# Altium PCB Project.PcbDoc
Units mm, origin at the board's own origin, x right, y up, seen from the top; angles counter-clockwise.
Board outline 25.53 x 18.29 mm, 2 copper layers (Top Layer, Bottom Layer); 40 components, 22 nets, 110 pads, 15 vias.
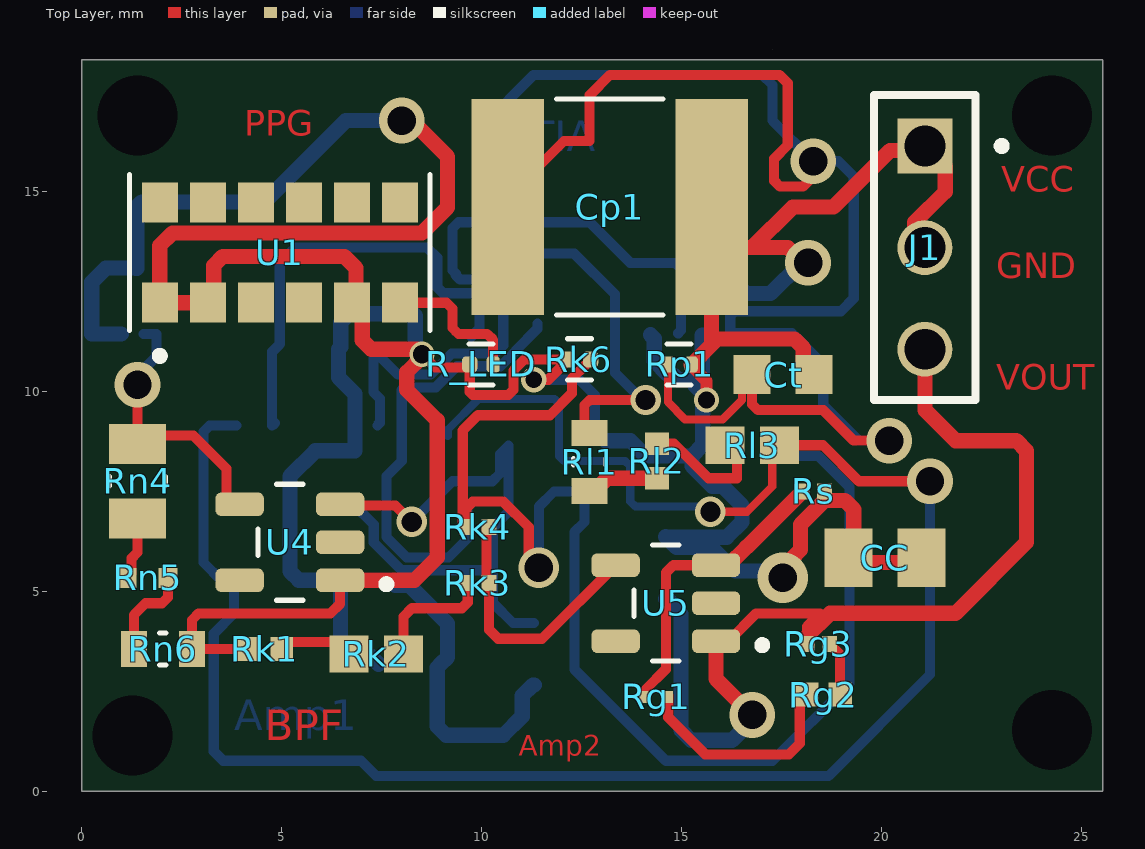
[diagram p0: Top Layer view]
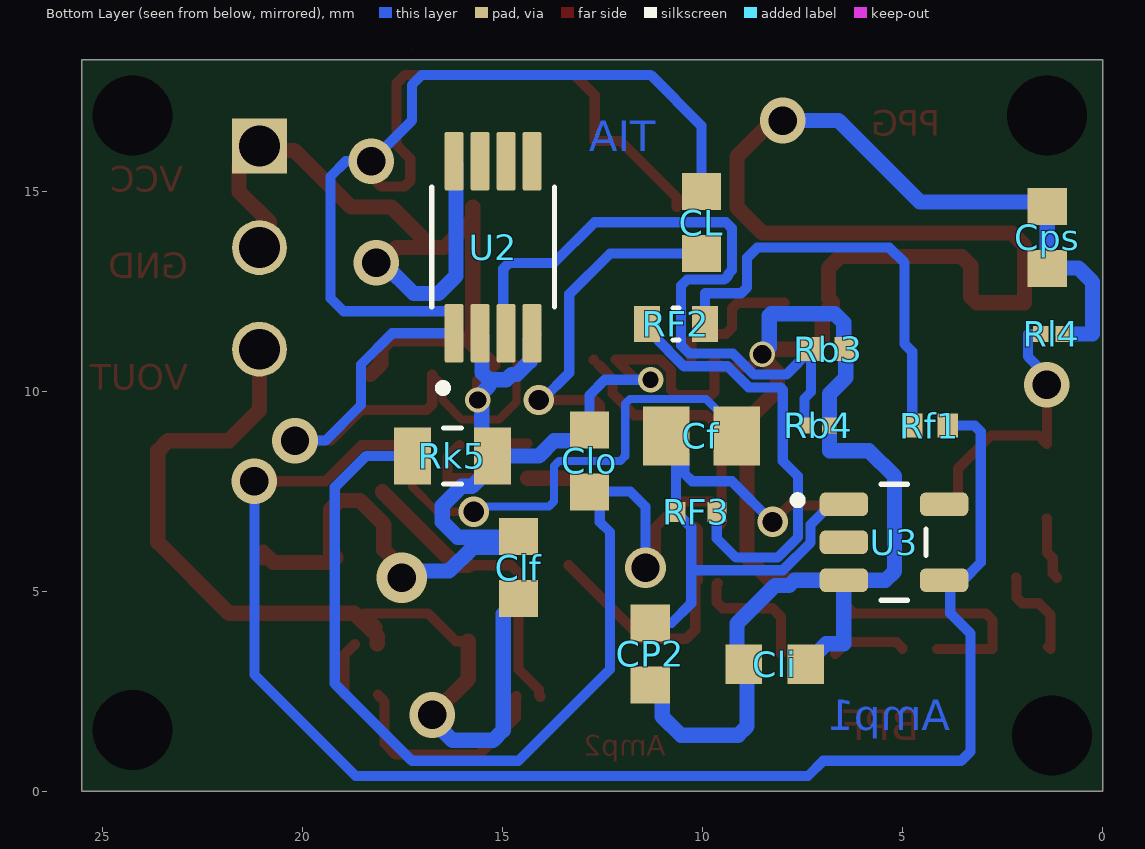
[diagram p1: Bottom Layer view, seen from below]

## Layer stack, top to bottom
Top Solder: solder mask 0.0102, Solder Resist, Dk 3.5
Top Layer: signal copper 0.0356
Dielectric 1: dielectric 0.32, FR-4, Dk 4.8
Bottom Layer: signal copper 0.0356
Bottom Solder: solder mask 0.0102, Solder Resist, Dk 3.5

## Board outline
0,0 25.527,0 25.527,18.288 0,18.288
cut-out: 17.272,18.542

## Design rules (kind name [scope] priority, off if disabled: settings)
Clearance [All] p1: gap=0.065 ignorepadtopadclearanceinfootprint=FALSE
HoleSize [All] p1: absolutevalues=TRUE maxlimit=2.54 minlimit=0.076 maxpercent=80.000 minpercent=20.000
HoleToHoleClearance [All] p1: gap=0.09 allowstackedmicrovias=TRUE
MinimumSolderMaskSliver [All] p1: minsoldermaskwidth=0.025
PolygonConnect [All] p1: connectstyle=Relief reliefconductorwidth=0.254 reliefentries=4 polygonreliefangle="90 Angle" airgapwidth=0.254
RoutingVias [All] p1: holewidth=0.711 width=1.27 viastyle="Through Hole" minholewidth=0.711 minwidth=1.27 maxholewidth=0.711 maxwidth=1.27
SilkToSilkClearance [All] p1: silktosilkclearance=0.127
SilkToSolderMaskClearance [IsText] p1: minsilkscreentomaskgap=0.127 clearancetoexposedcopper=TRUE
SolderMaskExpansion [All] p1: expansion=0.102
Width [All] p1: maxlimit=0.381 minlimit=0.127 preferedwidth=0.381
25 further rules are at their usual default settings.

## Components (designator, comment, footprint, x,y, rotation, side; value= is the part's Value field where it differs from the comment)
CC "22uF" INDC2112X145N 20.082,5.837 r0 top
Cf "0.39uF" CAPC2012X140N 10.033,8.88 r0 bottom (schematic designator CF)
CL "0.68uF" CAPC1608X90N 10.033,14.214 r270 bottom
Clf "10pF" CAPC1608X90N 14.605,5.588 r270 bottom
Cli "10pF" CAPC1608X90N 8.198,3.175 r180 bottom
Clo "10pF" CAPC1608X90N 12.827,8.255 r270 bottom
Cp1 "27nF" CAPC5750X330N 13.198,14.605 r180 top
CP2 "10pF" CAPC1608X90N 11.313,3.429 r90 bottom (schematic designator Cp2)
Cps "10pF" CAPC1608X90N 1.387,13.843 r90 bottom
Ct "10pF" CAPC1608X90N 17.536,10.414 r180 top
J1 "TSW-101-24-G-T" SAMTEC_TSW-101-24-G-T 21.082,16.129 r180 top
R_LED "100" RESC0603X26N#1 9.982,10.668 r180 top
Rb3 "220K" RESC1005X40N#1 6.858,11.049 r180 bottom
Rb4 "10K" RESC0603X26N#2 7.112,9.144 r0 bottom
Rf1 "100K" RESC1005X40N#2 4.318,9.138 r0 bottom (schematic designator RF1)
RF2 "5.1K" RES_ERA3AEB512V 10.668,11.684 r0 bottom
RF3 "240" RES_ERA2AED241X 10.16,6.985 r0 bottom
Rg1 "43K" *RES_ERJ1GNF4302C 14.363,2.355 r0 top
Rg2 "3.6K" RESC1005X35N 18.542,2.413 r0 top
Rg3 "160" RESC0603X26N#2 18.415,3.683 r180 top
Rk1 "82K" RESC1005X40N#1 4.572,3.556 r0 top
Rk2 "7.5K" RESC1508X50N 7.366,3.429 r0 top
Rk3 "510" *RESC0603X26N 9.906,5.207 r0 top
Rk4 "10K" RESC0603X26N#2 9.906,6.604 r0 top
Rk5 "400K" RESC2012X50N 16.256,8.382 r0 bottom
Rk6 "100K" RESC0603X26N#1 12.446,10.795 r0 top
Rl1 "300K" *RES_ERA3AEB304V 12.7,8.232 r270 top
Rl2 "56K" RESC1005X40N#1 14.378,8.255 r90 top
Rl3 "7.5K" RESC1508X50N 16.764,8.646 r0 top
Rl4 "10K" RESC0603X26N#2 1.27,11.43 r0 bottom
Rn4 "270K" RESC2012X65N 1.397,7.747 r270 top
Rn5 "22K" *RES_ERA2AEB223X 1.651,5.334 r0 top
Rn6 "750" RES_ERA3AEB751V 2.032,3.556 r0 top
Rp1 "1000K" RESC0603X26N#1 14.935,10.668 r180 top
Rs "10K" RESC0603X26N#2 18.288,7.493 r180 top
U1 "SFH_7072" XDCR_SFH_7072 4.953,13.462 r90 top
U2 "TIA 1(OPA2380)" SOP65P490X110-8N 15.24,13.599 r90 bottom
U3 "OP AMP-BPF" SOT95P280X145-5N 5.217,6.223 r180 bottom
U4 "OP AMP-Amp_Stage-l1" SOT95P280X145-5N 5.207,6.223 r180 top
U5 "LMH6609MFX/NOPB" SOT95P280X145-5N 14.605,4.699 r180 top

## Footprints (in the part's own frame and the unit in brackets; to place one, negate y for a bottom-side part, rotate by r counter-clockwise, add the part's x,y. Pads: shape width x height; smd on the part's side, far side on the other; paste and mask are expansions set on the pad)
*RES_ERA2AEB223X [mm]
  rect 0.475x0.5 smd: 1(-0.512,0) 2(0.512,0)
*RES_ERA3AEB304V [mm]
  rect 0.65x0.9 smd: 1(-0.725,0) 2(0.725,0)
  silkscreen extent -0.08,-0.4 0.08,0.4
*RES_ERJ1GNF4302C [mm]
  rect 0.25x0.3 smd: 1(-0.3,0) 2(0.3,0)
*RESC0603X26N [mm]
  rect 0.38x0.4 smd: 1(-0.281,0) 2(0.281,0)
CAPC1608X90N [mm]
  rect 0.92x0.98 smd: 1(-0.775,0) 2(0.775,0)
CAPC2012X140N [mm]
  rect 1.16x1.47 smd: 1(-0.88,0) 2(0.88,0)
CAPC5750X330N [mm]
  rect 1.81x5.41 smd: 1(-2.55,0) 2(2.55,0)
  silkscreen extent -1.33,-2.7 1.33,2.7
INDC2112X145N [mm]
  rect 1.2x1.47 smd: 1(-0.91,0) 2(0.91,0)
RES_ERA2AED241X [mm]
  rect 0.475x0.5 smd: 1(-0.512,0) 2(0.512,0)
  body extent -0.5,-0.25 0.5,0.25, height 0.35
RES_ERA3AEB512V [mm]
  rect 0.65x0.9 smd: 1(-0.725,0) 2(0.725,0)
  silkscreen extent -0.08,-0.4 0.08,0.4, body extent -0.8,-0.4 0.8,0.4, height 0.45
RES_ERA3AEB751V [mm]
  rect 0.65x0.9 smd: 1(-0.725,0) 2(0.725,0)
  silkscreen extent -0.08,-0.4 0.08,0.4, body extent -0.8,-0.4 0.8,0.4, height 0.45
RESC0603X26N#1 [mm]
  rrect50% 0.33x0.4 smd: 1(-0.305,0)
  rrect50% 0.38x0.4 smd: 2(0.28,0)
  silkscreen extent -0.3,-0.52 0.3,0.52
RESC0603X26N#2 [mm]
  rect 0.38x0.4 smd: 1(-0.281,0) 2(0.281,0)
  body extent -0.3,-0.15 0.3,0.15, height 0.26
RESC1005X35N [mm]
  rect 0.59x0.6 smd: 1(-0.42,0) 2(0.42,0)
RESC1005X40N#1 [mm]
  rect 0.56x0.6 smd: 1(-0.435,0) 2(0.435,0)
RESC1005X40N#2 [mm]
  rect 0.51x0.6 smd: 1(-0.445,0) 2(0.445,0)
RESC1508X50N [mm]
  rect 0.97x0.93 smd: 1(-0.68,0) 2(0.68,0)
RESC2012X50N [mm]
  rect 0.92x1.42 smd: 1(-1,0) 2(1,0)
  silkscreen extent -0.22,-0.7 0.22,0.7
RESC2012X65N [mm]
  rect 1x1.42 smd: 1(-0.935,0) 2(0.935,0)
  silkscreen extent -0.12,-0.7 0.12,0.7
SAMTEC_TSW-101-24-G-T [mm]
  rect 1.37x1.37 hole 1.02: 01(0,0)
  round 1.37 hole 1.02: 02(0,2.54) 03(0,5.08)
  silkscreen extent -2.02,-1.27 1.27,6.35
SOP65P490X110-8N [mm]
  rrect25% 1.47x0.48 smd: 1(-2.15,0.975) 2(-2.15,0.325) 3(-2.15,-0.325) 4(-2.15,-0.975) 5(2.15,-0.975) 6(2.15,-0.325) 7(2.15,0.325) 8(2.15,0.975)
  silkscreen extent -3.62,-1.54 1.5,1.54
SOT95P280X145-5N [mm]
  rrect50% 1.21x0.59 smd: 1(-1.255,0.95) 2(-1.255,0) 3(-1.255,-0.95) 4(1.255,-0.95) 5(1.255,0.95)
  silkscreen extent -2.51,-1.45 0.8,1.45
XDCR_SFH_7072 [mm]
  rect 1x0.9 smd paste-1 mask+0: 1(-1.25,3) 2(-1.25,1.8) 3(-1.25,0.6) 4(-1.25,-0.6) 5(-1.25,-1.8) 6(-1.25,-3) 7(1.25,-3) 8(1.25,-1.8) 9(1.25,-0.6) 10(1.25,0.6) 11(1.25,1.8) 12(1.25,3)
  silkscreen extent -2.68,-3.76 1.95,3.76

## Part data
CC: library part LMK212BBJ226MG-T, "22µF ±20% 10V Ceramic Capacitor X5R 0805 (2012 Metric)", Package="0805 Taiyo Yuden", Availability=Good, DigiKey-Purchase-URL=https://snapeda.com/shop?store=DigiKey&id=1756934, MF="Taiyo Yuden", Mouser-Purchase-URL=https://snapeda.com/shop?store=Mouser&id=1756934, MP=LMK212BBJ226MG-T, Price=None, SnapEDA_Link=https://www.snapeda.com/parts/LMK212BBJ226MG-T/Taiyo%20Yuden/view-part/1756934/?ref=snap
Cf: library part 0805YC394JAT2A, "0.39µF ±5% 16V Ceramic Capacitor X7R 0805 _2012 Metric_", Package="2012 AVX", Digi-Key_Part_Number=478-10574-2-ND, Digi-Key_Purchase_URL=https://www.digikey.com/product-detail/en/avx-corporation/0805YC394JAT2A/478-10574-2-ND/1603316?utm_source=snapeda&utm_medium=aggregator&utm_campaign=symbol, MF=AVX, MP=0805YC394JAT2A, SnapEDA_Link=https://www.snapeda.com/parts/0805YC394JAT2A/AVX/view-part/606850/?ref=snap
CL: library part C1608X7R1C684K080AC, "Multilayer Ceramic Capacitor, C Series, 0.68 - F, - 10%, X7R, 16 V, 0603 [1608 Metric]", Package=None, Availability=Unavailable, MP=C1608X7R1C684K080AC, Price=None
Clf Cli Clo CP2 Cps Ct: library part 06035A100JAT2A, "10PF 5% 50V C0G 0603", Package=None, Availability=Unavailable, MP=06035A100JAT2A, Price=None
Cp1: library part 06033C104KAT4A, "2220GC273KAT1A", Package="1608 AVX", Digi-Key_Part_Number=478-7018-1-ND, Digi-Key_Purchase_URL=https://www.digikey.com/product-detail/en/avx-corporation/06033C104KAT4A/478-7018-1-ND/3247565?utm_source=snapeda&utm_medium=aggregator&utm_campaign=symbol, MF=AVX, MP=06033C104KAT4A, SnapEDA_Link=https://www.snapeda.com/parts/06033C104KAT4A/AVX/view-part/1797095/?ref=snap
J1: "Connector Header Through Hole 3 position", Package=None, Availability=Bad, Check_prices=https://www.snapeda.com/parts/TSW-101-24-G-T/Samtec/view-part/3380371/?ref=eda, MF=Samtec, MP=TSW-101-24-G-T, Price=None, Purchase-URL=https://pricing.snapeda.com/search/part/TSW-101-24-G-T/?ref=eda, SnapEDA_Link=https://www.snapeda.com/parts/TSW-101-24-G-T/Samtec/view-part/3380371/?ref=snap
R_LED: library part RC0201FR-07100RL, "100 Ohms ±1% 0.05W, 1/20W Chip Resistor 0201 _0603 Metric_ Moisture Resistant Thick Film", Package="0201 Yageo", Digi-Key_Part_Number=311-100MCT-ND, MF=Yageo, MP=RC0201FR-07100RL, SnapEDA_Link=https://www.snapeda.com/parts/RC0201FR-07100RL/Yageo/view-part/938913/?ref=snap
Rb3: library part CRGCQ0402F220K, "Fixed Resistor CRGCQ 0402 220K 1%", Package=None, Availability=Unavailable, MP=CRGCQ0402F220K, Price=None
Rb4 Rk4 Rl4 Rs: library part RMCF0201FT10K0, "10 kOhms ±1% 0.05W, 1/20W Chip Resistor 0201 (0603 Metric) Thick Film", Package="0603 Rohm Semiconductor", Availability=Good, MF="Stackpole Electronics Inc", MP=RMCF0201FT10K0, Price=None, Purchase-URL=https://pricing.snapeda.com/search/part/RMCF0201FT10K0/?ref=eda, SnapEDA_Link=https://www.snapeda.com/parts/RMCF0201FT10K0/Stackpole%20Electronics%20Inc/view-part/3959982/?ref=snap
Rf1: library part RR0510P-104-D, "RES, THIN FILM, 100K, 0.5%, 0.063W, 0402, REEL", Package=None, Availability=Unavailable, MP=RR0510P-104-D, Price=None
RF2: library part ERA3AEB512V, "5.1 kOhms 0.1% 0.1W, 1/10W Chip Resistor 0603 (1608 Metric) Automotive AEC-Q200 Thin Film", Package="1608-2 Panasonic", Availability="In Stock", Check_prices=https://www.snapeda.com/parts/ERA-3AEB512V/Panasonic%20Electronic%20Components/view-part/329488/?ref=eda, MF=Panasonic, MP=ERA-3AEB512V, Price=None, SnapEDA_Link=https://www.snapeda.com/parts/ERA-3AEB512V/Panasonic%20Electronic%20Components/view-part/329488/?ref=snap
RF3: library part ERA2AED241X, "240 Ohms 0.5% 0.063W, 1/16W Chip Resistor 0402 (1005 Metric) Automotive AEC-Q200 Thin Film", Package="1005-2 Panasonic", Availability="In Stock", Check_prices=https://www.snapeda.com/parts/ERA-2AED241X/Panasonic/view-part/3718380/?ref=eda, MF=Panasonic, MP=ERA-2AED241X, Price=None, SnapEDA_Link=https://www.snapeda.com/parts/ERA-2AED241X/Panasonic/view-part/3718380/?ref=snap
Rg1: library part ERJ1GNF4302C, "None", Availability=Unavailable, MF=Panasonic, MP=ERJ1GNF4302C, Package=None, Price=None
Rg2: library part RMCF0402FT3K60, Package=None, Availability=Unavailable, MP=RMCF0402FT3K60, Price=None
Rg3: library part RC0201FR-07160RL, "Res Thick Film 0201 160 Ohm 1% 0.05W(1/20W) ±200ppm/°C Pad SMD T/R", Package="0603 Rohm Semiconductor", Availability="In Stock", Check_prices=https://www.snapeda.com/parts/RC0201FR-07160RL/Yageo/view-part/967070/?ref=eda, MF=Yageo, MP=RC0201FR-07160RL, Price=None, SnapEDA_Link=https://www.snapeda.com/parts/RC0201FR-07160RL/Yageo/view-part/967070/?ref=snap
Rk1: library part CRGCQ0402F82K, "Fixed Resistor CRGCQ 0402 82K 1%", Package=None, Availability=Unavailable, MP=CRGCQ0402F82K, Price=None
Rk2 Rl3: library part RNCP0603FTD7K50, Package=None, Availability=Unavailable, MP=RNCP0603FTD7K50, Price=None
Rk3: library part RC0201FR-07510RL, Check_prices=https://www.snapeda.com/parts/RC0201FR-07510RL/Yageo/view-part/938189/?ref=eda, SnapEDA_Link=https://www.snapeda.com/parts/RC0201FR-07510RL/Yageo/view-part/938189/?ref=snap
Rk5: library part CRCW0805400KJNTA, Package=None, Availability=Unavailable, MP=CRCW0805400KJNTA, Price=None
Rk6: library part RC0201JR-07100KL, "100 kOhms ±5% 0.05W, 1/20W Chip Resistor 0201 _0603 Metric_ Moisture Resistant Thick Film", Package="0201 Yageo", Digi-Key_Part_Number=311-100KNCT-ND, Digi-Key_Purchase_URL=https://www.digikey.com/product-detail/en/yageo/RC0201JR-07100KL/311-100KNCT-ND/1949005?utm_source=snapeda&utm_medium=aggregator&utm_campaign=symbol, MF=Yageo, MP=RC0201JR-07100KL, SnapEDA_Link=https://www.snapeda.com/parts/RC0201JR-07100KL/Yageo/view-part/2509071/?ref=snap
Rl1: library part ERA3AEB304V, Check_prices=https://www.snapeda.com/parts/ERA-3AEB304V/Panasonic%20Electronic%20Components/view-part/329732/?ref=eda, SnapEDA_Link=https://www.snapeda.com/parts/ERA-3AEB304V/Panasonic%20Electronic%20Components/view-part/329732/?ref=snap
Rl2: library part CRGCQ0402F56K, "Fixed Resistor CRGCQ 0402 56K 1%", Package=None, Availability=Unavailable, MP=CRGCQ0402F56K, Price=None
Rn4: library part CRG0805F270K, "CRG0805 1% 270K", Package=None, Availability=Unavailable, MP=CRG0805F270K, Price=None
Rn5: library part ERA2AEB223X, Check_prices=https://www.snapeda.com/parts/ERA-2AEB223X/Panasonic%20Electronic%20Components/view-part/274489/?ref=eda, SnapEDA_Link=https://www.snapeda.com/parts/ERA-2AEB223X/Panasonic%20Electronic%20Components/view-part/274489/?ref=snap
Rn6: library part ERA3AEB751V, "750 Ohms 0.1% 0.1W, 1/10W Chip Resistor 0603 (1608 Metric) Automotive AEC-Q200 Thin Film", Package="1608-2 Panasonic", Availability="In Stock", Check_prices=https://www.snapeda.com/parts/ERA-3AEB751V/Panasonic%20Electronic%20Components/view-part/329191/?ref=eda, MF=Panasonic, MP=ERA-3AEB751V, Price=None, SnapEDA_Link=https://www.snapeda.com/parts/ERA-3AEB751V/Panasonic%20Electronic%20Components/view-part/329191/?ref=snap
Rp1: library part RC0201FR-071ML, "1 MOhms ±1% 0.05W, 1/20W Chip Resistor 0201 (0603 Metric) Moisture Resistant Thick Film", Package="0201 Yageo", Arrow_Electronics-Purchase-URL=https://snapeda.com/shop?store=Arrow+Electronics&id=629704, Availability=Good, DigiKey-Purchase-URL=https://snapeda.com/shop?store=DigiKey&id=629704, MF=Yageo, Mouser-Purchase-URL=https://snapeda.com/shop?store=Mouser&id=629704, MP=RC0201FR-071ML, Price=None, SnapEDA_Link=https://www.snapeda.com/parts/RC0201FR-071ML/Yageo/view-part/629704/?ref=snap
U1: "Reflective Optical Sensor 6-SMD, No Lead", Package="SMD-6 Osram Opto", Availability=Unavailable, MF="OSRAM Opto", MP="SFH 7072", Price=None, SnapEDA_Link=https://www.snapeda.com/parts/SFH%207072/OSRAM%20Opto%20Semiconductors%20Inc./view-part/2464223/?ref=snap
U2: library part OPA2380AIDGKT, Package=None, Availability=Unavailable, MP=OPA2380AIDGKT, Price=None
U3 U4: library part LMH6609MFX/NOPB, Package=None, Availability=Unavailable, MP=LMH6609MFX/NOPB, Price=None
U5: Package=None, Availability=Unavailable, MP=LMH6609MFX/NOPB, Price=None

## Free pads (board coordinates)
  rect 0x0 hole 2 unplated: 11(1.27,1.397) 11(1.397,16.891) 11(24.257,1.524) 11(24.257,16.891)

## Via types
v1: diameter 1.143, hole 0.711, Top Layer to Bottom Layer, 7 vias
v2: diameter 0.762, hole 0.508, Top Layer to Bottom Layer, 3 vias
v3: diameter 1.27, hole 0.711, Top Layer to Bottom Layer, 1 vias
v4: diameter 0.635, hole 0.432, Top Layer to Bottom Layer, 1 vias
v5: diameter 0.635, hole 0.406, Top Layer to Bottom Layer, 1 vias
v6: diameter 1.016, hole 0.711, Top Layer to Bottom Layer, 1 vias
v7: diameter 0.635, hole 0.457, Top Layer to Bottom Layer, 1 vias

## Nets (pads, with @x,y where several pads share a name; then routed paths per layer and width w, separated by ;. In a path a pad name is that pad's centre, name@x,y a point inside that pad or via, vN(x,y) a via of type N, cw(c..) or ccw(c..) an arc to the next point about the centre after c; other vN are vias at no path point)
"5V VCC": CC.1 CC.2 Clf.1 Cli.1 Cli.2 Clo.1 Cp1.1 CP2.1 Cps.1 Cps.2 Ct.1 J1.01 J1.02 R_LED.2 Rb3.2 Rb4.1 Rk1.1 Rk5.1 Rk6.1 Rl4.1 Rn6.2 Rp1.1 Rs.1 U1.1 U1.2 U1.5 U2.2 U2.4 U2.8 U3.3 U4.1 | length 127.7
  Top Layer w0.254: Rk1.1 Rn6.2 2.757,4.281 2.921,4.445 6.223,4.445 6.462,4.684 U4.1 ; v7@8.382,11.049 v7(8.509,10.922) 8.836,10.595 9.639,10.595 R_LED.2@9.702,10.658 ; R_LED.2 R_LED.2@9.702,10.658 ; v5(11.303,10.287) 11.668,10.287 12.176,10.795 Rk6.1 11.071,10.795 10.795,10.519 10.795,10.033 10.668,9.906 9.779,9.906 9.702,9.983 R_LED.2@9.702,10.658 ; J1.01@20.971,16.018 J1.01
  Top Layer w0.305: Rp1.1 15.24,10.633 15.621,10.252 v4(15.621,9.779)
  Top Layer w0.381: U4.1 8.321,5.273 8.891,5.843 8.891,9.27 8.128,10.033 8.128,10.472 8.509,10.853 v7(8.509,10.922) ; v1(8.001,16.764) 8.242,16.764 9.144,15.862 9.144,14.592 8.509,13.957 2.273,13.957 1.953,13.637 U1.1 U1.2 3.302,12.361 3.302,13.143 3.525,13.366 6.573,13.366 6.858,13.081 6.858,12.317 U1.5 6.753,12.162 7.013,11.902 7.013,11.275 7.239,11.049 v7@8.382,11.049 ; R_LED.2@9.693,10.659 R_LED.2@9.701,10.659 ; Rp1.1 15.256,10.668 15.748,11.16 ; Cp1.1 Cp1.1@15.748,14.303 ; v3@17.78,5.842 17.973,6.035 17.973,6.67 18.568,7.265 19.081,7.265 19.304,7.042 19.304,5.969 CC.1 19.294,5.715 20.735,5.715 20.992,5.972 CC.2 ; v1(18.161,13.208) 18.034,13.208 17.653,13.589 16.764,13.589 ; Ct.1 18.041,10.684 18.041,11.08 17.818,11.303 15.891,11.303 15.748,11.16 ; J1.01@20.971,16.018 20.209,16.018 18.795,14.604 17.779,14.604 16.764,13.589 ; J1.02 20.828,13.843 20.828,14.224 21.59,14.986 21.59,15.621 J1.01 ; 15.748,11.16 Cp1.1@15.748,14.303 ; Cp1.1@15.748,14.303 16.462,13.589 16.764,13.589
  Bottom Layer w0.254: v5(11.303,10.287) 12.446,10.287 12.827,9.906 Clo.1
  Bottom Layer w0.381: Rl4.1 0.254,11.43 0.254,12.731 0.604,13.081 1.344,13.081 1.357,13.068 Cps.1 Cps.2 1.501,14.732 4.572,14.732 6.604,16.764 v1(8.001,16.764) ; Cli.2 6.915,3.683 6.472,3.683 U3.3 ; v7(8.509,10.922) 8.339,11.092 8.339,11.885 8.286,11.938 6.7,11.938 6.477,11.715 6.477,11.103 Rb3.2 6.423,10.341 6.831,9.933 Rb4.1 6.831,8.509 5.842,8.509 5.207,7.874 5.207,5.496 5.43,5.273 U3.3 ; CP2.1 11.283,2.654 11.013,2.384 11.013,1.869 10.541,1.397 9.113,1.397 8.89,1.62 8.89,3.092 Cli.1 9.144,3.346 9.144,4.191 8.194,5.141 7.838,5.141 7.706,5.273 U3.3 ; Clo.1@13.097,8.76 13.719,8.76 14.097,8.382 Rk5.1 ; U2.4@14.224,11.408 14.315,11.317 14.315,10.749 14.648,10.415 14.782,10.415 14.91,10.287 15.342,10.287 ; Clf.1 Clf.1@14.619,6.349 ; U2.2@15.516,11.399 15.516,10.461 15.342,10.287 ; U2.8@16.165,15.7 16.165,12.88 16.606,12.439 17.224,12.439 17.993,13.208 v1(18.161,13.208) ; v3(17.526,5.334) 17.356,5.504 16.34,5.504 15.748,6.096 14.872,6.096 Clf.1@14.619,6.349 ; Clf.1@14.619,6.349 16.128,6.349 16.51,6.731 16.51,7.143 16.032,7.621 15.767,7.621 15.256,8.132 Rk5.1 ; Rk5.1 15.526,8.652 15.526,9.615 15.621,9.71 v4(15.621,9.779) 15.621,9.848 15.342,10.127 15.342,10.287
"Analog Vout": Clf.2 J1.03 Rg3.2 U5.1 | length 25.1
  Top Layer w0.254: U5.1 16.17,3.749 16.866,4.445 18.459,4.445 18.134,4.12 Rg3.2
  Top Layer w0.381: U5.1 15.86,2.809 v1(16.764,1.905) ; Rg3.2@18.135,3.684 18.135,3.872 18.707,4.445 21.844,4.445 23.622,6.223 23.622,8.509 23.368,8.763 21.844,8.763 21.082,9.525 J1.03
  Bottom Layer w0.381: Clf.2 14.635,4.813 14.905,4.543 14.905,4.513 14.986,4.432 14.986,1.524 15.24,1.27 16.256,1.27 16.764,1.778 v1(16.764,1.905)
NetCF_1: Cf.1 Rf1.1 Rl3.2 U3.4 | length 50.4
  Top Layer w0.203: v2(15.721,6.985) 16.637,6.985 17.265,7.613 17.265,8.467 Rl3.2
  Top Layer w0.254: Rl3.2 18.532,8.646 19.431,7.747 v1(21.209,7.747)
  Bottom Layer w0.203: Cf.1 9.153,9.035 9.921,9.803 11.819,9.803 11.938,9.684 11.938,8.374 12.057,8.255 13.589,8.255 13.716,8.128 13.716,7.239 13.843,7.112 15.594,7.112 v2(15.721,6.985)
  Bottom Layer w0.254: Rf1.1 3.197,9.138 3.048,8.989 3.048,5.715 3.49,5.273 U3.4 3.81,5.121 3.81,4.445 3.302,3.937 3.302,0.999 3.539,0.762 6.985,0.762 7.366,0.381 18.674,0.381 21.209,2.916 v1(21.209,7.747)
NetCF_2: Cf.2 CP2.2 RF3.2 U3.1 U4.3 | length 15.6
  Top Layer w0.254: U4.3 6.492,7.143 7.843,7.143 v2(8.255,6.731)
  Bottom Layer w0.254: U3.1 6.793,7.173 7.301,6.665 7.301,6.218 7.996,5.523 10.225,5.523 10.287,5.461 ; v2(8.255,6.731) 9.271,7.747 10.265,7.747 10.46,7.942 10.46,8.427 10.672,8.639 RF3.2 10.287,6.6 10.287,5.461 ; CP2.2 10.782,4.204 10.287,4.699 10.287,5.461
NetCL_1: CL.1 Cp1.2 Ct.2 Rp1.2 U2.1 | length 47.3
  Top Layer w0.203: Rp1.2 14.655,9.729 15.089,9.295 16.026,9.295 16.51,9.779 16.51,10.163 Ct.2
  Top Layer w0.254: Cp1.2 10.648,14.843 12.061,16.256 12.7,16.256 12.7,17.399 13.208,17.907 17.443,17.907 17.653,17.697 17.653,16.152 17.312,15.812 17.312,15.262 17.461,15.113 18.034,15.113 18.288,15.367 v1(18.288,15.748) ; Ct.2 16.761,9.674 16.91,9.525 18.542,9.525 19.304,8.763 v1(20.193,8.763)
  Bottom Layer w0.254: CL.1 10.033,16.637 11.303,17.907 17.018,17.907 17.272,17.653 17.272,16.764 v1(18.288,15.748) 18.923,15.748 19.304,15.367 19.304,12.319 18.982,11.997 16.328,11.997 16.215,11.884 U2.1 17.761,11.449 18.542,10.668 18.542,9.652 19.431,8.763 v1(20.193,8.763)
NetCL_2: CL.2 Rl1.1 | length 9.1
  Top Layer w0.254: Rl1.1 12.573,9.084 12.573,9.652 12.7,9.779 v2(14.097,9.779)
  Bottom Layer w0.254: CL.2 12.319,13.439 13.335,12.423 13.335,10.461 14.017,9.779 v2(14.097,9.779)
NetClo_2: Clo.2 Rk4.1 Rk5.2 Rk6.2 | length 33.4
  Top Layer w0.254: v6(11.43,5.588) 11.176,5.842 11.176,6.604 10.541,7.239 9.779,7.239 9.625,7.085 Rk4.1 9.527,6.702 9.527,9.019 9.906,9.398 11.71,9.398 12.257,9.945 12.257,10.316 Rk6.2@12.599,10.658 ; Rk6.2@12.726,10.785 Rk6.2
  Bottom Layer w0.254: v6(11.43,5.588) 11.43,7.112 11.811,7.493 12.814,7.493 Clo.2 12.573,7.226 12.573,6.731 12.319,6.477 12.319,3.048 14.605,0.762 17.272,0.762 19.199,2.689 19.199,7.598 18.415,8.382 Rk5.2
NetR_LED_1: R_LED.1 U1.6 | length 3.6
  Top Layer w0.254: U1.6 9.122,12.212 9.271,12.063 9.271,11.583 9.336,11.518 9.336,11.514 9.42,11.43 10.138,11.43 10.287,11.281 R_LED.1
NetRb3_1: Rb3.1 Rb4.2 U2.3 | length 17.7
  Bottom Layer w0.254: Rb3.1 Rb3.1@7.293,11.029 ; Rb4.2 7.456,9.207 7.456,9.816 7.293,9.979 Rb3.1@7.293,11.029 ; 10.541,11.303 10.541,12.639 10.392,12.787 9.464,12.787 9.351,12.9 9.351,12.943 9.271,13.023 9.271,14.075 9.42,14.224 12.7,14.224 13.716,13.208 14.837,13.208 14.986,13.059 14.986,11.52 U2.3 ; 10.542,11.302 10.542,11.145 10.34,10.943 9.25,10.943 8.72,10.413 8.298,10.413 8.297,10.414 7.908,10.414 Rb3.1@7.293,11.029
NetRF1_2: Rf1.2 RF2.1 | length 11.5
  Bottom Layer w0.254: Rf1.2@4.826,9.201 Rf1.2 4.763,10.986 4.953,11.176 4.953,13.208 5.334,13.589 8.636,13.589 8.89,13.335 8.89,12.595 9.039,12.446 9.943,12.446 RF2.1 9.943,11.559 RF2.1@9.745,11.361
NetRF2_2: RF2.2 RF3.1 | length 11.1
  Bottom Layer w0.254: RF3.1 9.648,6.318 9.172,5.842 8.128,5.842 7.62,6.35 7.62,7.874 8.001,8.255 8.001,10.033 8.063,10.095 8.165,10.095 8.166,10.094 8.852,10.094 9.382,10.625 10.472,10.625 10.86,11.013 10.86,11.026 11.393,11.559 RF2.2
NetRg1_1: Rg1.1 Rs.2 U5.3 | length 7.6
  Top Layer w0.254: Rg1.1 14.063,2.376 14.097,2.41 14.097,2.54 14.605,3.048 14.605,5.461 14.793,5.649 U5.3
  Top Layer w0.381: U5.3 16.17,5.649 16.616,6.095 16.618,6.095 18.007,7.484 Rs.2
NetRg1_2: Rg1.2 Rg2.1 | length 5.6
  Top Layer w0.254: Rg1.2 14.663,2.376 14.665,2.378 14.665,1.845 15.59,0.92 17.684,0.92 17.954,1.19 17.954,2.245 Rg2.1
NetRg2_2: Rg2.2 Rg3.1 | length 1.4
  Top Layer w0.254: Rg3.1 18.696,3.673 18.962,3.407 Rg2.2
NetRk1_2: Rk1.2 Rk2.1 | length 1.9
  Top Layer w0.254: Rk1.2 5.007,3.576 5.16,3.729 6.386,3.729 Rk2.1
NetRk2_2: Rk2.2 Rk3.1 | length 3.2
  Top Layer w0.254: Rk2.2 8.046,4.363 8.255,4.572 9.503,4.572 9.652,4.721 9.652,5.18 Rk3.1
NetRk3_2: Rk3.2 Rk4.2 U5.4 | length 6.6
  Top Layer w0.254: Rk4.2 10.124,6.541 10.124,5.27 Rk3.2 10.187,4.037 10.414,3.81 11.511,3.81 U5.4
NetRl1_2: Rl1.2 Rl2.1 | length 1.8
  Top Layer w0.381: Rl1.2 12.825,7.507 13.138,7.82 Rl2.1
NetRl2_2: Rl2.2 Rl3.1 | length 3.3
  Top Layer w0.254: Rl2.2 14.805,8.69 15.672,7.823 16.383,7.823 16.383,8.347 Rl3.1
NetRl4_2: Rl4.2 Rn4.1 U4.4 | length 7.1
  Top Layer w0.254: v1(1.397,10.16) Rn4.1 1.605,8.89 2.794,8.89 3.621,8.063 3.621,7.339 3.788,7.173 U4.4 U4.4@3.891,7.112
  Bottom Layer w0.254: v1(1.397,10.16) 1.397,10.392 1.868,10.863 1.868,11.43 Rl4.2
NetRn4_2: Rn4.2 Rn5.1 | length 1.6
  Top Layer w0.254: Rn5.1 1.249,5.445 1.249,5.821 1.397,5.969 Rn4.2 Rn4.2@1.405,6.812
NetRn5_2: Rn5.2 Rn6.1 | length 2.5
  Top Layer w0.254: Rn6.1@1.361,3.61 Rn6.1 1.307,4.408 1.598,4.699 2.01,4.699 2.159,4.848 2.159,5.33 Rn5.2
pads on no net: U1.3 U1.4 U1.7 U1.8 U1.9 U1.10 U1.11 U1.12 U2.5 U2.6 U2.7 U3.2 U3.5 U4.2 U4.5 U5.2 U5.5

## Other copper
Top Layer:
  text "PPG" at 4.064,16.383 h0.64
  text "VCC" at 22.987,14.986 h0.64
  text "GND" at 22.86,12.827 h0.64
  text "VOUT" at 22.86,10.033 h0.64
  text "BPF" at 4.572,1.27 h0.76
  text "Amp2" at 10.922,0.889 h0.51
Bottom Layer:
  text "TIA" at 11.176,16.002 h0.76
  text "Amp1" at 3.81,1.524 h0.76